# Altium PCB PCB3.PcbDoc (part 2 of 4)
Units mm, origin at the board's own origin, x right, y up, seen from the top; angles counter-clockwise.
Board outline 130 x 71 mm, 4 copper layers (Top Layer, Mid Layer 1, Mid Layer 2, Bottom Layer), stack 1.57 mm thick; 325 components, 359 nets, 1545 pads, 1046 vias.
Unrouted connection lines stored in the file: 158.
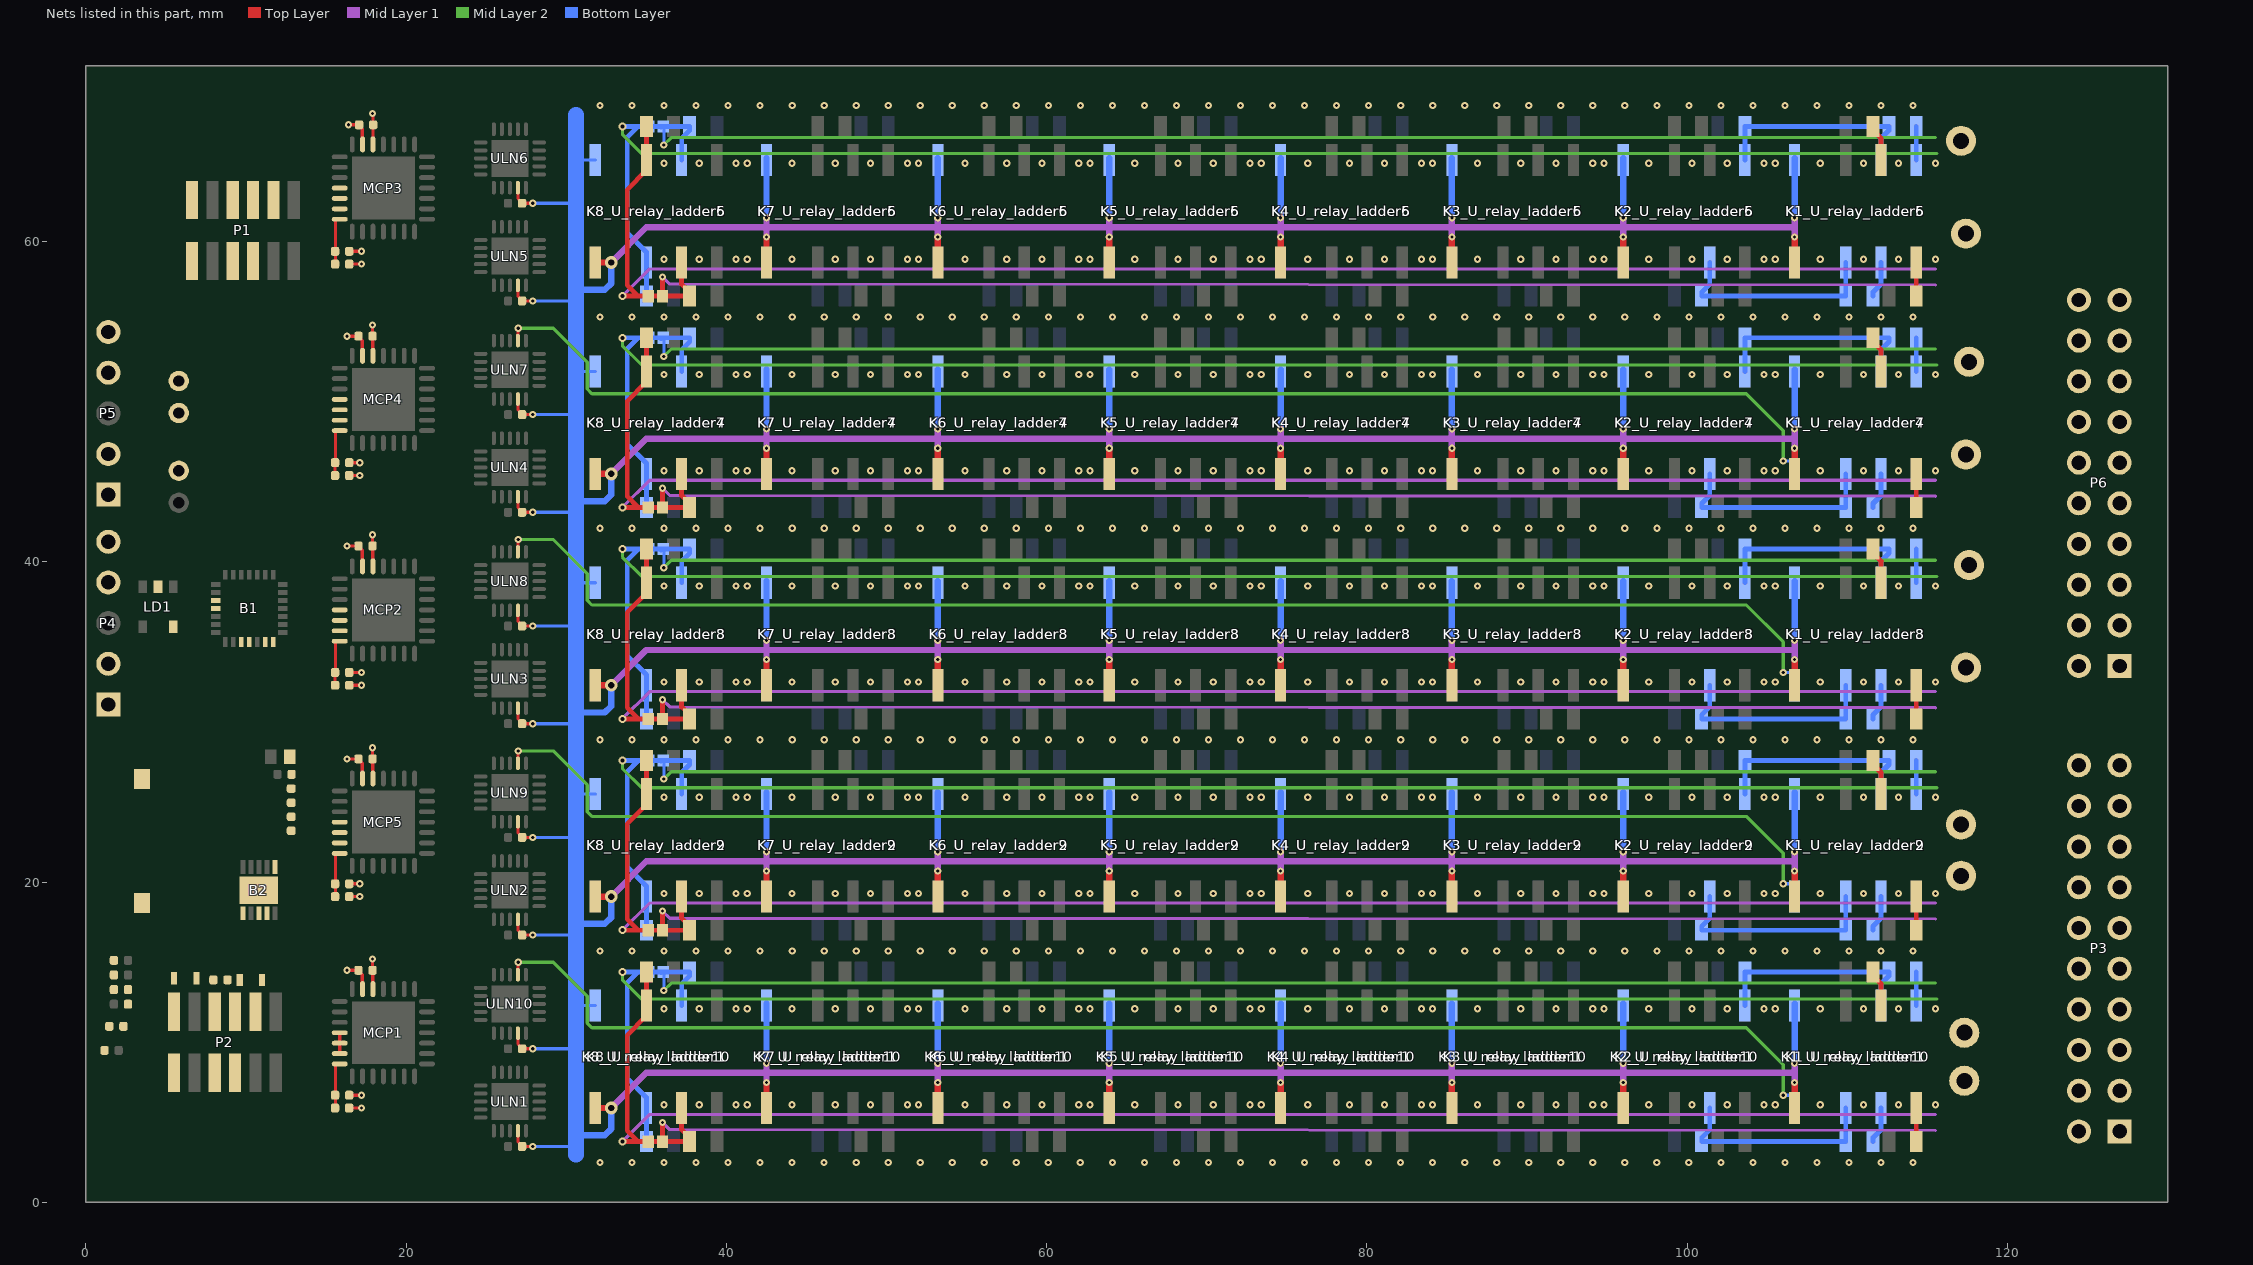
[diagram p4: the nets of this part, all layers, seen from the top]

## Part data
B1: "Mainstream Arm Cortex-M0+ MCU with 32 Kbytes of Flash memory, 12 Kbytes RAM, 48 MHz CPU, 2x USART, timers, ADC, comm. I/F, 2-3.6V", Manufacturer_Name=STMicroelectronics, Mouser Part Number=511-STM32C031G6U6, Datasheet Link=https://www.st.com/resource/en/datasheet/stm32c031c4.pdf, Geometry.Height=0.6mm, Manufacturer_Part_Number=STM32C031G6U6, Mouser Price/Stock=https://www.mouser.co.uk/ProductDetail/STMicroelectronics/STM32C031G6U6?qs=IPgv5n7u5QZqRf3nOTChhw%3D%3D
B2: "RS-422/RS-485 Interface IC Wide Supply Trans with I/O Interface", Manufacturer_Name="MaxLinear, Inc.", Mouser Part Number=701-XR33202EEHBTR-F, Datasheet Link=https://www.maxlinear.com/ds/xr33202.pdf, Geometry.Height=0.8mm, Manufacturer_Part_Number=XR33202EEHBTR-F, Mouser Price/Stock=https://www.mouser.co.uk/ProductDetail/MaxLinear/XR33202EEHBTR-F?qs=GtWAI9k6EVi4nRW8bj1LFw%3D%3D
C1 C2 C3 C4 C5 C6 C7 C8 C9 C10 C11 C12 C13 C14 C15 C16 C17 C18 C19 C22 C23 C24 C25 C26 C27 C28 C29: library part C, "Capacitor"
C20 C21: "Capacitor Polarized"
K1_U_relay_ladder1 K1_U_relay_ladder2 K1_U_relay_ladder3 K1_U_relay_ladder4 K1_U_relay_ladder5 K1_U_relay_ladder6 K1_U_relay_ladder7 K1_U_relay_ladder8 K1_U_relay_ladder9 K1_U_relay_ladder10 K2_U_relay_ladder1 K2_U_relay_ladder2 K2_U_relay_ladder3 K2_U_relay_ladder4 K2_U_relay_ladder5 K2_U_relay_ladder6 K2_U_relay_ladder7 K2_U_relay_ladder8 K2_U_relay_ladder9 K2_U_relay_ladder10 K3_U_relay_ladder1 K3_U_relay_ladder2 K3_U_relay_ladder3 K3_U_relay_ladder4 K3_U_relay_ladder5 K3_U_relay_ladder6 K3_U_relay_ladder7 K3_U_relay_ladder8 K3_U_relay_ladder9 K3_U_relay_ladder10 K4_U_relay_ladder1 K4_U_relay_ladder2 K4_U_relay_ladder3 K4_U_relay_ladder4 K4_U_relay_ladder5 K4_U_relay_ladder6 K4_U_relay_ladder7 K4_U_relay_ladder8 K4_U_relay_ladder9 K4_U_relay_ladder10 K5_U_relay_ladder1 K5_U_relay_ladder2 K5_U_relay_ladder3 K5_U_relay_ladder4 K5_U_relay_ladder5 K5_U_relay_ladder6 K5_U_relay_ladder7 K5_U_relay_ladder8 K5_U_relay_ladder9 K5_U_relay_ladder10 K6_U_relay_ladder1 K6_U_relay_ladder2 K6_U_relay_ladder3 K6_U_relay_ladder4 K6_U_relay_ladder5 K6_U_relay_ladder6 K6_U_relay_ladder7 K6_U_relay_ladder8 K6_U_relay_ladder9 K6_U_relay_ladder10 K7_U_relay_ladder1 K7_U_relay_ladder2 K7_U_relay_ladder3 K7_U_relay_ladder4 K7_U_relay_ladder5 K7_U_relay_ladder6 K7_U_relay_ladder7 K7_U_relay_ladder8 K7_U_relay_ladder9 K7_U_relay_ladder10 K8_U_relay_ladder1 K8_U_relay_ladder2 K8_U_relay_ladder3 K8_U_relay_ladder4 K8_U_relay_ladder5 K8_U_relay_ladder6 K8_U_relay_ladder7 K8_U_relay_ladder8 K8_U_relay_ladder9 K8_U_relay_ladder10: library part "IM-GR Relay DPDT", "TE CONNECTIVITY  IM-GR  RELAY, DPDT, NO", Farnell ID=1175070, URL=http://si.farnell.com/te-connectivity-axicom/im06gr/relay-gull-wing-dpco-12vdc-2a/dp/1175070
P1 P2: library part "Header 6X2", "Header, 6-Pin, Dual row", LatestRevisionDate=17-Jul-2002, LatestRevisionNote="Re-released for DXP Platform.", Publisher="Altium Limited"
P3 P6: "Header, 10-Pin, Dual row", LatestRevisionDate=17-Jul-2002, LatestRevisionNote="Re-released for DXP Platform.", Publisher="Altium Limited"
P4 P5: "Header, 5-Pin", LatestRevisionDate=17-Jul-2002, LatestRevisionNote="Re-released for DXP Platform.", Publisher="Altium Limited"
R1 R2 R3 R4 R5_U_relay_ladder1 R5_U_relay_ladder2 R5_U_relay_ladder3 R5_U_relay_ladder4 R5_U_relay_ladder5 R5_U_relay_ladder6 R5_U_relay_ladder7 R5_U_relay_ladder8 R5_U_relay_ladder9 R5_U_relay_ladder10 R6_U_relay_ladder1 R6_U_relay_ladder2 R6_U_relay_ladder3 R6_U_relay_ladder4 R6_U_relay_ladder5 R6_U_relay_ladder6 R6_U_relay_ladder7 R6_U_relay_ladder8 R6_U_relay_ladder9 R6_U_relay_ladder10 R7_U_relay_ladder1 R7_U_relay_ladder2 R7_U_relay_ladder3 R7_U_relay_ladder4 R7_U_relay_ladder5 R7_U_relay_ladder6 R7_U_relay_ladder7 R7_U_relay_ladder8 R7_U_relay_ladder9 R7_U_relay_ladder10 R8_U_relay_ladder1 R8_U_relay_ladder2 R8_U_relay_ladder3 R8_U_relay_ladder4 R8_U_relay_ladder5 R8_U_relay_ladder6 R8_U_relay_ladder7 R8_U_relay_ladder8 R8_U_relay_ladder9 R8_U_relay_ladder10 R9_U_relay_ladder1 R9_U_relay_ladder2 R9_U_relay_ladder3 R9_U_relay_ladder4 R9_U_relay_ladder5 R9_U_relay_ladder6 R9_U_relay_ladder7 R9_U_relay_ladder8 R9_U_relay_ladder9 R9_U_relay_ladder10 R10_U_relay_ladder1 R10_U_relay_ladder2 R10_U_relay_ladder3 R10_U_relay_ladder4 R10_U_relay_ladder5 R10_U_relay_ladder6 R10_U_relay_ladder7 R10_U_relay_ladder8 R10_U_relay_ladder9 R10_U_relay_ladder10 R11_U_relay_ladder1 R11_U_relay_ladder2 R11_U_relay_ladder3 R11_U_relay_ladder4 R11_U_relay_ladder5 R11_U_relay_ladder6 R11_U_relay_ladder7 R11_U_relay_ladder8 R11_U_relay_ladder9 R11_U_relay_ladder10 R12_U_relay_ladder1 R12_U_relay_ladder2 R12_U_relay_ladder3 R12_U_relay_ladder4 R12_U_relay_ladder5 R12_U_relay_ladder6 R12_U_relay_ladder7 R12_U_relay_ladder8 R12_U_relay_ladder9 R12_U_relay_ladder10 R13_U_relay_ladder1 R13_U_relay_ladder2 R13_U_relay_ladder3 R13_U_relay_ladder4 R13_U_relay_ladder5 R13_U_relay_ladder6 R13_U_relay_ladder7 R13_U_relay_ladder8 R13_U_relay_ladder9 R13_U_relay_ladder10 R14_U_relay_ladder1 R14_U_relay_ladder2 R14_U_relay_ladder3 R14_U_relay_ladder4 R14_U_relay_ladder5 R14_U_relay_ladder6 R14_U_relay_ladder7 R14_U_relay_ladder8 R14_U_relay_ladder9 R14_U_relay_ladder10 R15_U_relay_ladder1 R15_U_relay_ladder2 R15_U_relay_ladder3 R15_U_relay_ladder4 R15_U_relay_ladder5 R15_U_relay_ladder6 R15_U_relay_ladder7 R15_U_relay_ladder8 R15_U_relay_ladder9 R15_U_relay_ladder10 R16_U_relay_ladder1 R16_U_relay_ladder2 R16_U_relay_ladder3 R16_U_relay_ladder4 R16_U_relay_ladder5 R16_U_relay_ladder6 R16_U_relay_ladder7 R16_U_relay_ladder8 R16_U_relay_ladder9 R16_U_relay_ladder10 R17_U_relay_ladder1 R17_U_relay_ladder2 R17_U_relay_ladder3 R17_U_relay_ladder4 R17_U_relay_ladder5 R17_U_relay_ladder6 R17_U_relay_ladder7 R17_U_relay_ladder8 R17_U_relay_ladder9 R17_U_relay_ladder10 R18_U_relay_ladder1 R18_U_relay_ladder2 R18_U_relay_ladder3 R18_U_relay_ladder4 R18_U_relay_ladder5 R18_U_relay_ladder6 R18_U_relay_ladder7 R18_U_relay_ladder8 R18_U_relay_ladder9 R18_U_relay_ladder10 R19_U_relay_ladder1 R19_U_relay_ladder2 R19_U_relay_ladder3 R19_U_relay_ladder4 R19_U_relay_ladder5 R19_U_relay_ladder6 R19_U_relay_ladder7 R19_U_relay_ladder8 R19_U_relay_ladder9 R19_U_relay_ladder10 R20_U_relay_ladder1 R20_U_relay_ladder2 R20_U_relay_ladder3 R20_U_relay_ladder4 R20_U_relay_ladder5 R20_U_relay_ladder6 R20_U_relay_ladder7 R20_U_relay_ladder8 R20_U_relay_ladder9 R20_U_relay_ladder10 R21 R22 R23 R24 R25: library part R, "R"
X1: "Tactile Switches Tact 50mA 12VDC, 6.0x3.5, 2.5mm H, 180gf, G leads, No ground pin, White Actuator", Manufacturer_Name="C & K COMPONENTS", Manufacturer_Part_Number="PTS636 SM25 SMTR LFS", Mouser Part Number=611-PTS636SM25SMTRLF, Datasheet Link="https://componentsearchengine.com/Datasheets/1/PTS636 SM25 SMTR LFS.pdf", Geometry.Height=2.7mm, Mouser Price/Stock=https://www.mouser.co.uk/ProductDetail/CK/PTS636-SM25-SMTR-LFS?qs=vLWxofP3U2yIXR4iooxesw%3D%3D

## Via types
v1: diameter 0.45, hole 0.2, Top Layer to Bottom Layer, 944 vias
v2: diameter 0.5, hole 0.2, Top Layer to Bottom Layer, 85 vias
v3: diameter 0.5, hole 0.25, Top Layer to Bottom Layer, 10 vias
v4: diameter 0.8, hole 0.4, Top Layer to Bottom Layer, 5 vias
v5: diameter 5.5, hole 3, Top Layer to Bottom Layer, 2 vias

## Nets (pads, with @x,y where several pads share a name; then routed paths per layer and width w, separated by ;. In a path a pad name is that pad's centre, name@x,y a point inside that pad or via, vN(x,y) a via of type N, cw(c..) or ccw(c..) an arc to the next point about the centre after c; other vN are vias at no path point)
+3V3: B1.3 B2.1 C1.1 C3.1 C7.2 C10.1 C11.1 C12.2 C13.2 C24.2 C25.2 LD1.5 MCP1.5 MCP2.5 MCP2.11 MCP3.5 MCP3.12 MCP4.5 MCP4.11 MCP4.12 MCP5.5 MCP5.13 R1.1 R2.1 R4.1 R21.1 R22.1 R23.1 R24.1 R25.1 | length 13.3
  Top Layer w0.2: R21.1@16.44,5.9 v1(17.2,5.9) ; R25.1@16.44,19.1 v1(17.1,19.1) ; R22.1@16.44,32.3 v1(17.2,32.3) ; R24.1@16.44,45.4 v1(17.1,45.4) ; R23.1@16.44,58.6 v1(17.2,58.6) ; v1(17.9,15.2) C13.2@17.9,14.5 17.912,14.488 17.912,13.338 MCP1.5@17.925,13.325 ; v1(17.9,28.4) C12.2@17.9,27.7 17.912,27.688 17.912,26.488 MCP5.5@17.925,26.475 ; v1(17.9,41.7) C25.2@17.9,41 17.912,40.988 17.912,39.738 MCP2.5@17.925,39.725 ; v1(17.9,54.8) C7.2@17.9,54.1 17.912,54.088 17.912,52.887 MCP4.5@17.925,52.875 ; v1(17.9,68) 17.92,67.98 17.92,67.32 C24.2@17.94,67.3 17.932,67.293 17.932,66.083 MCP3.5@17.925,66.075
+12: C14.1 C15.1 C16.1 C17.1 C18.1 C19.1 C20.1 C26.1 C27.1 C28.1 C29.1 K1_U_relay_ladder1.1 K1_U_relay_ladder2.1 K1_U_relay_ladder3.1 K1_U_relay_ladder4.1 K1_U_relay_ladder5.1 K1_U_relay_ladder6.1 K1_U_relay_ladder7.1 K1_U_relay_ladder8.1 K1_U_relay_ladder9.1 K1_U_relay_ladder10.1 K2_U_relay_ladder1.1 K2_U_relay_ladder2.1 K2_U_relay_ladder3.1 K2_U_relay_ladder4.1 K2_U_relay_ladder5.1 K2_U_relay_ladder6.1 K2_U_relay_ladder7.1 K2_U_relay_ladder8.1 K2_U_relay_ladder9.1 K2_U_relay_ladder10.1 K3_U_relay_ladder1.1 K3_U_relay_ladder2.1 K3_U_relay_ladder3.1 K3_U_relay_ladder4.1 K3_U_relay_ladder5.1 K3_U_relay_ladder6.1 K3_U_relay_ladder7.1 K3_U_relay_ladder8.1 K3_U_relay_ladder9.1 K3_U_relay_ladder10.1 K4_U_relay_ladder1.1 K4_U_relay_ladder2.1 K4_U_relay_ladder3.1 K4_U_relay_ladder4.1 K4_U_relay_ladder5.1 K4_U_relay_ladder6.1 K4_U_relay_ladder7.1 K4_U_relay_ladder8.1 K4_U_relay_ladder9.1 K4_U_relay_ladder10.1 K5_U_relay_ladder1.1 K5_U_relay_ladder2.1 K5_U_relay_ladder3.1 K5_U_relay_ladder4.1 K5_U_relay_ladder5.1 K5_U_relay_ladder6.1 K5_U_relay_ladder7.1 K5_U_relay_ladder8.1 K5_U_relay_ladder9.1 K5_U_relay_ladder10.1 K6_U_relay_ladder1.1 K6_U_relay_ladder2.1 K6_U_relay_ladder3.1 K6_U_relay_ladder4.1 K6_U_relay_ladder5.1 K6_U_relay_ladder6.1 K6_U_relay_ladder7.1 K6_U_relay_ladder8.1 K6_U_relay_ladder9.1 K6_U_relay_ladder10.1 K7_U_relay_ladder1.1 K7_U_relay_ladder2.1 K7_U_relay_ladder3.1 K7_U_relay_ladder4.1 K7_U_relay_ladder5.1 K7_U_relay_ladder6.1 K7_U_relay_ladder7.1 K7_U_relay_ladder8.1 K7_U_relay_ladder9.1 K7_U_relay_ladder10.1 K8_U_relay_ladder1.1 K8_U_relay_ladder2.1 K8_U_relay_ladder3.1 K8_U_relay_ladder4.1 K8_U_relay_ladder5.1 K8_U_relay_ladder6.1 K8_U_relay_ladder7.1 K8_U_relay_ladder8.1 K8_U_relay_ladder9.1 K8_U_relay_ladder10.1 P4.2 P4.4 P5.2 P5.4 ULN1.9 ULN2.9 ULN3.9 ULN4.9 ULN5.9 ULN6.9 ULN7.9 ULN8.9 ULN9.9 ULN10.9 | length 740
  Top Layer w0.2: ULN1.9@26.975,4.475 26.985,4.465 26.985,3.792 27.24,3.536 C15.1@27.24,3.5 v1(27.9,3.5) ; ULN10.9@26.975,10.575 26.985,10.565 26.985,9.892 27.24,9.636 C16.1@27.24,9.6 v1(27.9,9.6) ; ULN2.9@26.975,17.675 26.985,17.665 26.985,16.992 27.24,16.736 C17.1@27.24,16.7 v1(27.9,16.7) ; ULN9.9@26.975,23.775 26.985,23.765 26.985,23.092 27.24,22.836 C26.1@27.24,22.8 v1(27.9,22.8) ; ULN3.9@26.975,30.875 26.985,30.865 26.985,30.192 27.24,29.936 C28.1@27.24,29.9 v1(27.9,29.9) ; ULN8.9@26.975,36.975 26.985,36.965 26.985,36.292 27.24,36.036 C29.1@27.24,36 v1(27.9,36) ; ULN4.9@26.975,44.075 26.985,44.065 26.985,43.392 27.24,43.136 C27.1@27.24,43.1 v1(27.9,43.1) ; ULN7.9@26.975,50.175 26.985,50.165 26.985,49.492 27.24,49.236 C14.1@27.24,49.2 v1(27.9,49.2) ; ULN5.9@26.975,57.275 26.985,57.265 26.985,56.592 27.24,56.336 C19.1@27.24,56.3 v1(27.9,56.3) ; ULN6.9@26.975,63.375 26.985,63.365 26.985,62.692 27.24,62.436 C18.1@27.24,62.4 v1(27.9,62.4)
  Top Layer w0.4: K8_U_relay_ladder10.1@31.803,5.9 v4(32.8,5.9) ; K8_U_relay_ladder9.1@31.803,19.1 v4(32.8,19.1) ; K8_U_relay_ladder8.1@31.803,32.3 v4(32.8,32.3) ; K8_U_relay_ladder7.1@31.803,45.5 v4@32.8,45.5 ; K8_U_relay_ladder6.1@31.803,58.7 v4(32.8,58.7) ; v1(42.5,7.5) 42.5,5.9 K7_U_relay_ladder10.1@42.503,5.9 ; v1(42.5,20.7) 42.5,19.1 K7_U_relay_ladder9.1@42.503,19.1 ; v1(42.5,33.9) 42.5,32.3 K7_U_relay_ladder8.1@42.503,32.3 ; v1(42.5,47.1) 42.5,45.5 K7_U_relay_ladder7.1@42.503,45.5 ; v1(42.5,60.3) 42.5,58.7 K7_U_relay_ladder6.1@42.503,58.7 ; K6_U_relay_ladder10.1@53.2,5.9 v1(53.2,7.5) ; K6_U_relay_ladder9.1@53.2,19.1 v1(53.2,20.7) ; K6_U_relay_ladder8.1@53.2,32.3 v1(53.2,33.9) ; K6_U_relay_ladder7.1@53.2,45.5 v1(53.2,47.1) ; K6_U_relay_ladder6.1@53.2,58.7 v1(53.2,60.3) ; K5_U_relay_ladder10.1@63.903,5.9 v1(63.903,7.5) ; K5_U_relay_ladder9.1@63.903,19.1 v1(63.903,20.7) ; K5_U_relay_ladder8.1@63.903,32.3 v1(63.903,33.9) ; K5_U_relay_ladder7.1@63.903,45.5 v1(63.903,47.1) ; K5_U_relay_ladder6.1@63.903,58.7 v1(63.903,60.3) ; K4_U_relay_ladder10.1@74.603,5.9 v1(74.603,7.5) ; K4_U_relay_ladder9.1@74.603,19.1 v1(74.603,20.7) ; K4_U_relay_ladder8.1@74.603,32.3 v1(74.603,33.9) ; K4_U_relay_ladder7.1@74.603,45.5 v1(74.603,47.1) ; K4_U_relay_ladder6.1@74.603,58.7 v1(74.603,60.3) ; K3_U_relay_ladder10.1@85.303,5.9 v1(85.303,7.5) ; K3_U_relay_ladder9.1@85.303,19.1 v1(85.303,20.7) ; K3_U_relay_ladder8.1@85.303,32.3 v1(85.303,33.9) ; K3_U_relay_ladder7.1@85.303,45.5 v1(85.303,47.1) ; K3_U_relay_ladder6.1@85.303,58.7 v1(85.303,60.3) ; K2_U_relay_ladder10.1@96.003,5.9 v1(96.003,7.5) ; K2_U_relay_ladder9.1@96.003,19.1 v1(96.003,20.7) ; K2_U_relay_ladder8.1@96.003,32.3 v1(96.003,33.9) ; K2_U_relay_ladder7.1@96.003,45.5 v1(96.003,47.1) ; K2_U_relay_ladder6.1@96.003,58.7 v1(96.003,60.3) ; K1_U_relay_ladder10.1@106.703,5.9 v1(106.703,7.5) ; K1_U_relay_ladder9.1@106.703,19.1 v1(106.703,20.7) ; K1_U_relay_ladder8.1@106.703,32.3 v1(106.703,33.9) ; K1_U_relay_ladder7.1@106.703,45.5 v1(106.703,47.1) ; K1_U_relay_ladder6.1@106.703,58.7 v1(106.703,60.3)
  Mid Layer 1 w0.4: v4(32.8,5.9) 35,8.1 42.5,8.1 ; v4(32.8,19.1) 35,21.3 42.5,21.3 ; v4(32.8,32.3) 35,34.5 42.5,34.5 ; v4(32.8,45.5) 35,47.7 42.5,47.7 ; v4(32.8,58.7) 35,60.9 42.5,60.9 ; v1(42.5,7.5) 42.5,8.1 ; v1(42.5,8.7) 42.5,8.1 ; v1(42.5,20.7) 42.5,21.3 ; v1(42.5,21.9) 42.5,21.3 ; v1(42.5,33.9) 42.5,34.5 ; v1(42.5,35.1) 42.5,34.5 ; v1(42.5,47.1) 42.5,47.7 ; v1(42.5,48.3) 42.5,47.7 ; v1(42.5,60.3) 42.5,60.9 ; v1(42.5,61.5) 42.5,60.9 ; v1(53.2,7.5) 53.2,8.1 ; v1(53.2,8.7) 53.2,8.1 ; v1(53.2,20.7) 53.2,21.3 ; v1(53.2,21.9) 53.2,21.3 ; v1(53.2,33.9) 53.2,34.5 ; v1(53.2,35.1) 53.2,34.5 ; v1(53.2,47.1) 53.2,47.7 ; v1(53.2,48.3) 53.2,47.7 ; v1(53.2,60.3) 53.2,60.9 ; v1(53.2,61.5) 53.2,60.9 ; 53.203,8.1 63.903,8.1 ; 53.203,21.3 63.903,21.3 ; 53.203,34.5 63.903,34.5 ; 53.203,47.7 63.903,47.7 ; 53.203,60.9 63.903,60.9 ; v1(63.903,7.5) 63.903,8.1 ; v1(63.903,8.7) 63.903,8.1 ; v1(63.903,20.7) 63.903,21.3 ; v1(63.903,21.9) 63.903,21.3 ; v1(63.903,33.9) 63.903,34.5 ; v1(63.903,35.1) 63.903,34.5 ; v1(63.903,47.1) 63.903,47.7 ; v1(63.903,48.3) 63.903,47.7 ; v1(63.903,60.3) 63.903,60.9 ; v1(63.903,61.5) 63.903,60.9 ; v1(74.603,7.5) 74.603,8.1 ; v1(74.603,8.7) 74.603,8.1 ; v1(74.603,20.7) 74.603,21.3 ; v1(74.603,21.9) 74.603,21.3 ; v1(74.603,33.9) 74.603,34.5 ; v1(74.603,35.1) 74.603,34.5 ; v1(74.603,47.1) 74.603,47.7 ; v1(74.603,48.3) 74.603,47.7 ; v1(74.603,60.3) 74.603,60.9 ; v1(74.603,61.5) 74.603,60.9 ; v1(85.303,7.5) 85.303,8.1 ; v1(85.303,8.7) 85.303,8.1 ; v1(85.303,20.7) 85.303,21.3 ; v1(85.303,21.9) 85.303,21.3 ; v1(85.303,33.9) 85.303,34.5 ; v1(85.303,35.1) 85.303,34.5 ; v1(85.303,47.1) 85.303,47.7 ; v1(85.303,48.3) 85.303,47.7 ; v1(85.303,60.3) 85.303,60.9 ; v1(85.303,61.5) 85.303,60.9 ; v1(96.003,7.5) 96.003,8.1 ; v1(96.003,8.7) 96.003,8.1 ; v1(96.003,20.7) 96.003,21.3 ; v1(96.003,21.9) 96.003,21.3 ; v1(96.003,33.9) 96.003,34.5 ; v1(96.003,35.1) 96.003,34.5 ; v1(96.003,47.1) 96.003,47.7 ; v1(96.003,48.3) 96.003,47.7 ; v1(96.003,60.3) 96.003,60.9 ; v1(96.003,61.5) 96.003,60.9 ; v1(106.703,7.5) 106.703,8.1 ; v1(106.703,8.7) 106.703,8.1 ; v1(106.703,20.7) 106.703,21.3 ; v1(106.703,21.9) 106.703,21.3 ; v1(106.703,33.9) 106.703,34.5 ; v1(106.703,35.1) 106.703,34.5 ; v1(106.703,47.1) 106.703,47.7 ; v1(106.703,48.3) 106.703,47.7 ; v1(106.703,60.3) 106.703,60.9 ; v1(106.703,61.5) 106.703,60.9 ; 42.5,8.1 53.2,8.1 ; 42.5,21.3 53.2,21.3 ; 42.5,34.5 53.2,34.5 ; 42.5,47.7 53.2,47.7 ; 42.5,60.9 53.2,60.9 ; 63.903,8.1 74.603,8.1 ; 63.903,21.3 74.603,21.3 ; 63.903,34.5 74.603,34.5 ; 63.903,47.7 74.603,47.7 ; 63.903,60.9 74.603,60.9 ; 74.603,8.1 85.303,8.1 ; 74.603,21.3 85.303,21.3 ; 74.603,34.5 85.303,34.5 ; 74.603,47.7 85.303,47.7 ; 74.603,60.9 85.303,60.9 ; 85.303,8.1 96.003,8.1 ; 85.303,21.3 96.003,21.3 ; 85.303,34.5 96.003,34.5 ; 85.303,47.7 96.003,47.7 ; 85.303,60.9 96.003,60.9 ; 96.003,8.1 106.703,8.1 ; 96.003,21.3 106.703,21.3 ; 96.003,34.5 106.703,34.5 ; 96.003,47.7 106.703,47.7 ; 96.003,60.9 106.703,60.9
  Bottom Layer w0.2: v1(27.9,3.5) 30.4,3.5 30.6,3.7 ; v1(27.9,9.6) 30.6,9.6 ; v1(27.9,16.7) 30.6,16.7 ; v1(27.9,22.8) 30.6,22.8 ; v1(27.9,29.9) 30.6,29.9 ; v1(27.9,36) 30.6,36 ; v1(27.9,43.1) 30.6,43.1 ; v1(27.9,49.2) 30.6,49.2 ; v1(27.9,56.3) 30.6,56.3 ; v1(27.9,62.4) 30.6,62.4 ; 30.6,12.3 K8_U_relay_ladder1.1@31.802,12.3 ; 30.6,25.5 K8_U_relay_ladder2.1@31.802,25.5 ; 30.6,38.7 K8_U_relay_ladder3.1@31.802,38.7 ; 30.6,51.9 K8_U_relay_ladder4.1@31.802,51.9 ; 30.6,65.1 K8_U_relay_ladder5.1@31.802,65.1
  Bottom Layer w0.4: 30.6,4.3 30.7,4.2 32.409,4.2 32.8,4.591 v4(32.8,5.9) ; 30.7,17.4 32.409,17.4 32.8,17.791 v4(32.8,19.1) ; 30.7,30.6 32.409,30.6 32.8,30.991 v4(32.8,32.3) ; 30.7,43.8 32.409,43.8 32.8,44.191 v4(32.8,45.5) ; 30.7,57 32.409,57 32.8,57.391 v4(32.8,58.7) ; v1(42.5,8.7) K7_U_relay_ladder1.1@42.5,12.4 ; v1(42.5,21.9) K7_U_relay_ladder2.1@42.5,25.6 ; v1(42.5,35.1) K7_U_relay_ladder3.1@42.5,38.8 ; v1(42.5,48.3) K7_U_relay_ladder4.1@42.5,52 ; v1(42.5,61.5) K7_U_relay_ladder5.1@42.5,65.2 ; v1(53.2,8.7) K6_U_relay_ladder1.1@53.2,12.4 ; v1(53.2,21.9) K6_U_relay_ladder2.1@53.2,25.6 ; v1(53.2,35.1) K6_U_relay_ladder3.1@53.2,38.8 ; v1(53.2,48.3) K6_U_relay_ladder4.1@53.2,52 ; v1(53.2,61.5) K6_U_relay_ladder5.1@53.2,65.2 ; v1(63.903,8.7) K5_U_relay_ladder1.1@63.903,12.4 ; v1(63.903,21.9) K5_U_relay_ladder2.1@63.903,25.6 ; v1(63.903,35.1) K5_U_relay_ladder3.1@63.903,38.8 ; v1(63.903,48.3) K5_U_relay_ladder4.1@63.903,52 ; v1(63.903,61.5) K5_U_relay_ladder5.1@63.903,65.2 ; v1(74.603,8.7) K4_U_relay_ladder1.1@74.603,12.4 ; v1(74.603,21.9) K4_U_relay_ladder2.1@74.603,25.6 ; v1(74.603,35.1) K4_U_relay_ladder3.1@74.603,38.8 ; v1(74.603,48.3) K4_U_relay_ladder4.1@74.603,52 ; v1(74.603,61.5) K4_U_relay_ladder5.1@74.603,65.2 ; v1(85.303,8.7) K3_U_relay_ladder1.1@85.303,12.4 ; v1(85.303,21.9) K3_U_relay_ladder2.1@85.303,25.6 ; v1(85.303,35.1) K3_U_relay_ladder3.1@85.303,38.8 ; v1(85.303,48.3) K3_U_relay_ladder4.1@85.303,52 ; v1(85.303,61.5) K3_U_relay_ladder5.1@85.303,65.2 ; v1(96.003,8.7) K2_U_relay_ladder1.1@96.003,12.4 ; v1(96.003,21.9) K2_U_relay_ladder2.1@96.003,25.6 ; v1(96.003,35.1) K2_U_relay_ladder3.1@96.003,38.8 ; v1(96.003,48.3) K2_U_relay_ladder4.1@96.003,52 ; v1(96.003,61.5) K2_U_relay_ladder5.1@96.003,65.2 ; v1(106.703,8.7) K1_U_relay_ladder1.1@106.703,12.4 ; v1(106.703,21.9) K1_U_relay_ladder2.1@106.703,25.6 ; v1(106.703,35.1) K1_U_relay_ladder3.1@106.703,38.8 ; v1(106.703,48.3) K1_U_relay_ladder4.1@106.703,52 ; v1(106.703,61.5) K1_U_relay_ladder5.1@106.703,65.2
  Bottom Layer w1: 30.6,3 30.6,3.7 30.6,4.3 30.6,9.6 30.6,12.3 30.6,16.7 30.6,22.8 30.6,25.5 30.6,29.9 30.6,36 30.6,38.7 30.6,43.1 30.6,49.2 30.6,51.9 30.6,56.3 30.6,62.4 30.6,65.1 30.6,67.9
A1: K1_U_relay_ladder10.6 P3.3 R13_U_relay_ladder10.1 | length 2.3
  Top Layer w0.3: R13_U_relay_ladder10.1@111.6,14.4 111.6,14.15 112.1,13.65 K1_U_relay_ladder10.6@112.1,12.3
A2: K1_U_relay_ladder9.6 P3.7 R13_U_relay_ladder9.1 | length 2.3
  Top Layer w0.3: R13_U_relay_ladder9.1@111.6,27.6 111.6,27.35 112.1,26.85 K1_U_relay_ladder9.6@112.1,25.5
A3: K1_U_relay_ladder8.6 P3.11 R13_U_relay_ladder8.1 | length 2.3
  Top Layer w0.3: R13_U_relay_ladder8.1@111.6,40.8 111.6,40.55 112.1,40.05 K1_U_relay_ladder8.6@112.1,38.7
A4: K1_U_relay_ladder7.6 P3.15 R13_U_relay_ladder7.1 | length 2.3
  Top Layer w0.3: R13_U_relay_ladder7.1@111.6,54 111.6,53.75 112.1,53.25 K1_U_relay_ladder7.6@112.1,51.901
A5: K1_U_relay_ladder6.6 P3.19 R13_U_relay_ladder6.1 | length 2.3
  Top Layer w0.3: R13_U_relay_ladder6.1@111.6,67.2 111.6,66.95 112.1,66.45 K1_U_relay_ladder6.6@112.1,65.1
A6: K1_U_relay_ladder5.6 P6.17 R13_U_relay_ladder5.1 | length 2.3
  Bottom Layer w0.3: R13_U_relay_ladder5.1@111.6,56.6 111.6,56.85 112.1,57.35 K1_U_relay_ladder5.6@112.1,58.7
A7: K1_U_relay_ladder4.6 P6.13 R13_U_relay_ladder4.1 | length 2.3
  Bottom Layer w0.3: R13_U_relay_ladder4.1@111.6,43.4 111.6,43.65 112.1,44.15 K1_U_relay_ladder4.6@112.1,45.5
A8: K1_U_relay_ladder3.6 P6.9 R13_U_relay_ladder3.1 | length 2.3
  Bottom Layer w0.3: R13_U_relay_ladder3.1@111.6,30.2 111.6,30.45 112.1,30.95 K1_U_relay_ladder3.6@112.1,32.299
A9: K1_U_relay_ladder2.6 P6.5 R13_U_relay_ladder2.1 | length 2.3
  Bottom Layer w0.3: R13_U_relay_ladder2.1@111.6,17 111.6,17.25 112.1,17.75 K1_U_relay_ladder2.6@112.1,19.1
A10: K1_U_relay_ladder1.6 P6.1 R13_U_relay_ladder1.1 | length 2.3
  Bottom Layer w0.3: R13_U_relay_ladder1.1@111.6,3.8 111.6,4.05 112.1,4.55 K1_U_relay_ladder1.6@112.1,5.9
A_N: B2.8 P1.6 P2.6 R3.2
AGND: P3.4 P3.8 P3.12 P3.16 P3.20 P6.4 P6.8 P6.12 P6.16 P6.20
  other v1: 32.1,2.5 34.1,2.5 36.1,2.5 38.1,2.5 40.1,2.5 42.1,2.5 44.1,2.5 46.1,2.5 48.1,2.5 50.1,2.5 52.1,2.5 54.1,2.5 56.1,2.5 58.1,2.5 60.1,2.5 62.1,2.5 64.1,2.5 66.1,2.5 68.1,2.5 70.1,2.5 72.1,2.5 74.1,2.5 76.1,2.5 78.1,2.5 80.1,2.5 82.1,2.5 84.1,2.5 86.1,2.5 88.1,2.5 90.1,2.5 92.1,2.5 94.1,2.5 96.1,2.5 98.1,2.5 100.1,2.5 102.1,2.5 104.1,2.5 106.1,2.5 108.1,2.5 110.1,2.5 112.1,2.5 114.1,2.5 36.1,6.1 38.3,6.1 40.6,6.1 41.3,6.1 44.1,6.1 46.8,6.1 49,6.1 51.3,6.1 52,6.1 54.9,6.1 57.5,6.1 59.7,6.1 62,6.1 62.7,6.1 65.5,6.1 68.2,6.1 70.4,6.1 72.7,6.1 73.4,6.1 76.3,6.1 78.9,6.1 81.1,6.1 83.4,6.1 84.1,6.1 86.9,6.1 89.6,6.1 91.8,6.1 94.1,6.1 94.8,6.1 97.6,6.1 100.3,6.1 102.5,6.1 104.8,6.1 105.5,6.1 108.3,6.1 111,6.1 113.2,6.1 115.5,6.1 36.1,12.1 38.3,12.1 40.6,12.1 41.3,12.1 44.1,12.1 46.8,12.1 49,12.1 51.3,12.1 52,12.1 54.9,12.1 57.5,12.1 59.7,12.1 62,12.1 62.7,12.1 65.5,12.1 68.2,12.1 70.4,12.1 72.7,12.1 73.4,12.1 76.3,12.1 78.9,12.1 81.1,12.1 83.4,12.1 84.1,12.1 86.9,12.1 89.6,12.1 91.8,12.1 94.1,12.1 94.8,12.1 97.6,12.1 100.3,12.1 102.5,12.1 104.8,12.1 105.5,12.1 108.3,12.1 111,12.1 113.2,12.1 115.5,12.1 32.103,15.7 34.103,15.7 36.103,15.7 38.103,15.7 40.103,15.7 42.103,15.7 44.103,15.7 46.103,15.7 48.103,15.7 50.103,15.7 52.103,15.7 54.103,15.7 56.103,15.7 58.103,15.7 60.103,15.7 62.103,15.7 64.103,15.7 66.103,15.7 68.103,15.7 70.103,15.7 72.103,15.7 74.103,15.7 76.103,15.7 78.103,15.7 80.103,15.7 82.103,15.7 84.103,15.7 86.103,15.7 88.103,15.7 90.103,15.7 92.103,15.7 94.103,15.7 96.103,15.7 98.103,15.7 100.103,15.7 102.103,15.7 104.103,15.7 106.103,15.7 108.103,15.7 110.103,15.7 112.103,15.7 114.103,15.7 36.1,19.3 38.3,19.3 40.6,19.3 41.3,19.3 44.1,19.3 46.8,19.3 49,19.3 51.3,19.3 52,19.3 54.9,19.3 57.5,19.3 59.7,19.3 62,19.3 62.7,19.3 65.5,19.3 68.2,19.3 70.4,19.3 72.7,19.3 73.4,19.3 76.3,19.3 78.9,19.3 81.1,19.3 83.4,19.3 84.1,19.3 86.9,19.3 89.6,19.3 91.8,19.3 94.1,19.3 94.8,19.3 97.6,19.3 100.3,19.3 102.5,19.3 104.8,19.3 105.5,19.3 108.3,19.3 111,19.3 113.2,19.3 115.5,19.3 36.1,25.3 38.3,25.3 40.6,25.3 41.3,25.3 44.1,25.3 46.8,25.3 49,25.3 51.3,25.3 52,25.3 54.9,25.3 57.5,25.3 59.7,25.3 62,25.3 62.7,25.3 65.5,25.3 68.2,25.3 70.4,25.3 72.7,25.3 73.4,25.3 76.3,25.3 78.9,25.3 81.1,25.3 83.4,25.3 84.1,25.3 86.9,25.3 89.6,25.3 91.8,25.3 94.1,25.3 94.8,25.3 97.6,25.3 100.3,25.3 102.5,25.3 104.8,25.3 105.5,25.3 108.3,25.3 111,25.3 113.2,25.3 115.5,25.3 32.103,28.9 34.103,28.9 36.103,28.9 38.103,28.9 40.103,28.9 42.103,28.9 44.103,28.9 46.103,28.9 48.103,28.9 50.103,28.9 52.103,28.9 54.103,28.9 56.103,28.9 58.103,28.9 60.103,28.9 62.103,28.9 64.103,28.9 66.103,28.9 68.103,28.9 70.103,28.9 72.103,28.9 74.103,28.9 76.103,28.9 78.103,28.9 80.103,28.9 82.103,28.9 84.103,28.9 86.103,28.9 88.103,28.9 90.103,28.9 92.103,28.9 94.103,28.9 96.103,28.9 98.103,28.9 100.103,28.9 102.103,28.9 104.103,28.9 106.103,28.9 108.103,28.9 110.103,28.9 112.103,28.9 114.103,28.9 36.1,32.5 38.3,32.5 40.6,32.5 41.3,32.5 44.1,32.5 46.8,32.5 49,32.5 51.3,32.5 52,32.5 54.9,32.5 57.5,32.5 59.7,32.5 62,32.5 62.7,32.5 65.5,32.5 68.2,32.5 70.4,32.5 72.7,32.5 73.4,32.5 76.3,32.5 78.9,32.5 81.1,32.5 83.4,32.5 84.1,32.5 86.9,32.5 89.6,32.5 91.8,32.5 94.1,32.5 94.8,32.5 97.6,32.5 100.3,32.5 102.5,32.5 104.8,32.5 105.5,32.5 108.3,32.5 111,32.5 113.2,32.5 115.5,32.5 36.1,38.5 38.3,38.5 40.6,38.5 41.3,38.5 44.1,38.5 46.8,38.5 49,38.5 51.3,38.5 52,38.5 54.9,38.5 57.5,38.5 59.7,38.5 62,38.5 62.7,38.5 65.5,38.5 68.2,38.5 70.4,38.5 72.7,38.5 73.4,38.5 76.3,38.5 78.9,38.5 81.1,38.5 83.4,38.5 84.1,38.5 86.9,38.5 89.6,38.5 91.8,38.5 94.1,38.5 94.8,38.5 97.6,38.5 100.3,38.5 102.5,38.5 104.8,38.5 105.5,38.5 108.3,38.5 111,38.5 113.2,38.5 115.5,38.5 32.103,42.1 34.103,42.1 36.103,42.1 38.103,42.1 40.103,42.1 42.103,42.1 44.103,42.1 46.103,42.1 48.103,42.1 50.103,42.1 52.103,42.1 54.103,42.1 56.103,42.1 58.103,42.1 60.103,42.1 62.103,42.1 64.103,42.1 66.103,42.1 68.103,42.1 70.103,42.1 72.103,42.1 74.103,42.1 76.103,42.1 78.103,42.1 80.103,42.1 82.103,42.1 84.103,42.1 86.103,42.1 88.103,42.1 90.103,42.1 92.103,42.1 94.103,42.1 96.103,42.1 98.103,42.1 100.103,42.1 102.103,42.1 104.103,42.1 106.103,42.1 108.103,42.1 110.103,42.1 112.103,42.1 114.103,42.1 36.1,45.7 38.3,45.7 40.6,45.7 41.3,45.7 44.1,45.7 46.8,45.7 49,45.7 51.3,45.7 52,45.7 54.9,45.7 57.5,45.7 59.7,45.7 62,45.7 62.7,45.7 65.5,45.7 68.2,45.7 70.4,45.7 72.7,45.7 73.4,45.7 76.3,45.7 78.9,45.7 81.1,45.7 83.4,45.7 84.1,45.7 86.9,45.7 89.6,45.7 91.8,45.7 94.1,45.7 94.8,45.7 97.6,45.7 100.3,45.7 102.5,45.7 104.8,45.7 105.5,45.7 108.3,45.7 111,45.7 113.2,45.7 115.5,45.7 36.1,51.7 38.3,51.7 40.6,51.7 41.3,51.7 44.1,51.7 46.8,51.7 49,51.7 51.3,51.7 52,51.7 54.9,51.7 57.5,51.7 59.7,51.7 62,51.7 62.7,51.7 65.5,51.7 68.2,51.7 70.4,51.7 72.7,51.7 73.4,51.7 76.3,51.7 78.9,51.7 81.1,51.7 83.4,51.7 84.1,51.7 86.9,51.7 89.6,51.7 91.8,51.7 94.1,51.7 94.8,51.7 97.6,51.7 100.3,51.7 102.5,51.7 104.8,51.7 105.5,51.7 108.3,51.7 111,51.7 113.2,51.7 115.5,51.7 32.103,55.3 34.103,55.3 36.103,55.3 38.103,55.3 40.103,55.3 42.103,55.3 44.103,55.3 46.103,55.3 48.103,55.3 50.103,55.3 52.103,55.3 54.103,55.3 56.103,55.3 58.103,55.3 60.103,55.3 62.103,55.3 64.103,55.3 66.103,55.3 68.103,55.3 70.103,55.3 72.103,55.3 74.103,55.3 76.103,55.3 78.103,55.3 80.103,55.3 82.103,55.3 84.103,55.3 86.103,55.3 88.103,55.3 90.103,55.3 92.103,55.3 94.103,55.3 96.103,55.3 98.103,55.3 100.103,55.3 102.103,55.3 104.103,55.3 106.103,55.3 108.103,55.3 110.103,55.3 112.103,55.3 114.103,55.3 36.1,58.9 38.3,58.9 40.6,58.9 41.3,58.9 44.1,58.9 46.8,58.9 49,58.9 51.3,58.9 52,58.9 54.9,58.9 57.5,58.9 59.7,58.9 62,58.9 62.7,58.9 65.5,58.9 68.2,58.9 70.4,58.9 72.7,58.9 73.4,58.9 76.3,58.9 78.9,58.9 81.1,58.9 83.4,58.9 84.1,58.9 86.9,58.9 89.6,58.9 91.8,58.9 94.1,58.9 94.8,58.9 97.6,58.9 100.3,58.9 102.5,58.9 104.8,58.9 105.5,58.9 108.3,58.9 111,58.9 113.2,58.9 115.5,58.9 36.1,64.9 38.3,64.9 40.6,64.9 41.3,64.9 44.1,64.9 46.8,64.9 49,64.9 51.3,64.9 52,64.9 54.9,64.9 57.5,64.9 59.7,64.9 62,64.9 62.7,64.9 65.5,64.9 68.2,64.9 70.4,64.9 72.7,64.9 73.4,64.9 76.3,64.9 78.9,64.9 81.1,64.9 83.4,64.9 84.1,64.9 86.9,64.9 89.6,64.9 91.8,64.9 94.1,64.9 94.8,64.9 97.6,64.9 100.3,64.9 102.5,64.9 104.8,64.9 105.5,64.9 108.3,64.9 111,64.9 113.2,64.9 115.5,64.9 32.103,68.5 34.103,68.5 36.103,68.5 38.103,68.5 40.103,68.5 42.103,68.5 44.103,68.5 46.103,68.5 48.103,68.5 50.103,68.5 52.103,68.5 54.103,68.5 56.103,68.5 58.103,68.5 60.103,68.5 62.103,68.5 64.103,68.5 66.103,68.5 68.103,68.5 70.103,68.5 72.103,68.5 74.103,68.5 76.103,68.5 78.103,68.5 80.103,68.5 82.103,68.5 84.103,68.5 86.103,68.5 88.103,68.5 90.103,68.5 92.103,68.5 94.103,68.5 96.103,68.5 98.103,68.5 100.103,68.5 102.103,68.5 104.103,68.5 106.103,68.5 108.103,68.5 110.103,68.5 112.103,68.5 114.103,68.5
B1: J3_U_relay_ladder10.1 J3_U_relay_ladder10.2 K8_U_relay_ladder10.3 K8_U_relay_ladder10.7 P3.2 R12_U_relay_ladder10.2 R20_U_relay_ladder10.2 TP1.1 | length 183.6
  Top Layer w0.3: v3(33.5,3.8) 34.492,3.8 ; R20_U_relay_ladder10.2@35,14.15 R20_U_relay_ladder10.2@35.25,13.9 ; R20_U_relay_ladder10.2@35,14.4 35.002,14.398 35.002,14.15 35.002,12.302 K8_U_relay_ladder10.7@35.003,12.3 35.003,11.65 33.8,10.447 33.8,4.492 34.492,3.8 ; v1(36,5) 36,3.9 J3_U_relay_ladder10.1@36.1,3.8 ; K8_U_relay_ladder10.3@37.2,5.899 37.2,4.55 37.7,4.05 R12_U_relay_ladder10.2@37.7,3.8 J3_U_relay_ladder10.1@36.1,3.8 ; 34.492,3.8 J3_U_relay_ladder10.2@34.786,3.8 ; J3_U_relay_ladder10.2@34.786,3.8 J3_U_relay_ladder10.2@35.111,3.8 ; J3_U_relay_ladder10.2@34.786,3.8 J3_U_relay_ladder10.2@35.111,3.8 ; J3_U_relay_ladder10.2@35.111,3.8 J3_U_relay_ladder10.1@35.686,3.8 ; J3_U_relay_ladder10.2@35.111,3.8 J3_U_relay_ladder10.1@35.686,3.8 ; J3_U_relay_ladder10.1@35.686,3.8 J3_U_relay_ladder10.1@36.1,3.8 ; J3_U_relay_ladder10.1@35.686,3.8 J3_U_relay_ladder10.1@36.1,3.8 ; J3_U_relay_ladder10.1@35.686,3.8 J3_U_relay_ladder10.1@36.1,3.8
  Mid Layer 1 w0.2: v3(33.5,3.8) 35.2,5.5 115.495,5.5 ; v1(36,5) 36.45,4.55 37.2,4.55 115.499,4.5
B2: J3_U_relay_ladder9.1 J3_U_relay_ladder9.2 K8_U_relay_ladder9.3 K8_U_relay_ladder9.7 P3.6 R12_U_relay_ladder9.2 R20_U_relay_ladder9.2 TP2.1 | length 183.6
  Top Layer w0.3: v3(33.5,17) 34.492,17 ; R20_U_relay_ladder9.2@35,27.35 R20_U_relay_ladder9.2@35.25,27.1 ; R20_U_relay_ladder9.2@35,27.6 35.002,27.598 35.002,27.35 35.002,25.502 K8_U_relay_ladder9.7@35.003,25.5 35.003,24.85 33.8,23.647 33.8,17.692 34.492,17 ; v1(36,18.2) 36,17.1 J3_U_relay_ladder9.1@36.1,17 ; K8_U_relay_ladder9.3@37.2,19.099 37.2,17.75 37.7,17.25 R12_U_relay_ladder9.2@37.7,17 J3_U_relay_ladder9.1@36.1,17 ; 34.492,17 J3_U_relay_ladder9.2@34.786,17 ; J3_U_relay_ladder9.2@34.786,17 J3_U_relay_ladder9.2@35.111,17 ; J3_U_relay_ladder9.2@34.786,17 J3_U_relay_ladder9.2@35.111,17 ; J3_U_relay_ladder9.2@35.111,17 J3_U_relay_ladder9.1@35.686,17 ; J3_U_relay_ladder9.2@35.111,17 J3_U_relay_ladder9.1@35.686,17 ; J3_U_relay_ladder9.1@35.686,17 J3_U_relay_ladder9.1@36.1,17 ; J3_U_relay_ladder9.1@35.686,17 J3_U_relay_ladder9.1@36.1,17 ; J3_U_relay_ladder9.1@35.686,17 J3_U_relay_ladder9.1@36.1,17
  Mid Layer 1 w0.2: v3(33.5,17) 35.2,18.7 115.495,18.7 ; v1(36,18.2) 36.45,17.75 37.2,17.75 115.499,17.7
B3: J3_U_relay_ladder8.1 J3_U_relay_ladder8.2 K8_U_relay_ladder8.3 K8_U_relay_ladder8.7 P3.10 R12_U_relay_ladder8.2 R20_U_relay_ladder8.2 TP3.1 | length 183.6
  Top Layer w0.3: v3(33.5,30.2) 34.492,30.2 ; R20_U_relay_ladder8.2@35,40.55 R20_U_relay_ladder8.2@35.25,40.3 ; R20_U_relay_ladder8.2@35,40.8 35.002,40.798 35.002,40.55 35.002,38.702 K8_U_relay_ladder8.7@35.003,38.7 35.003,38.05 33.8,36.847 33.8,30.892 34.492,30.2 ; v1(36,31.4) 36,30.3 J3_U_relay_ladder8.1@36.1,30.2 ; K8_U_relay_ladder8.3@37.2,32.299 37.2,30.95 37.7,30.45 R12_U_relay_ladder8.2@37.7,30.2 J3_U_relay_ladder8.1@36.1,30.2 ; 34.492,30.2 J3_U_relay_ladder8.2@34.786,30.2 ; J3_U_relay_ladder8.2@34.786,30.2 J3_U_relay_ladder8.2@35.111,30.2 ; J3_U_relay_ladder8.2@34.786,30.2 J3_U_relay_ladder8.2@35.111,30.2 ; J3_U_relay_ladder8.2@35.111,30.2 J3_U_relay_ladder8.1@35.686,30.2 ; J3_U_relay_ladder8.2@35.111,30.2 J3_U_relay_ladder8.1@35.686,30.2 ; J3_U_relay_ladder8.1@35.686,30.2 J3_U_relay_ladder8.1@36.1,30.2 ; J3_U_relay_ladder8.1@35.686,30.2 J3_U_relay_ladder8.1@36.1,30.2 ; J3_U_relay_ladder8.1@35.686,30.2 J3_U_relay_ladder8.1@36.1,30.2
  Mid Layer 1 w0.2: v3(33.5,30.2) 35.2,31.9 115.495,31.9 ; v1(36,31.4) 36.45,30.95 37.2,30.95 115.499,30.9
B4: J3_U_relay_ladder7.1 J3_U_relay_ladder7.2 K8_U_relay_ladder7.3 K8_U_relay_ladder7.7 P3.14 R12_U_relay_ladder7.2 R20_U_relay_ladder7.2 TP4.1 | length 183.6
  Top Layer w0.3: v3(33.5,43.4) 34.492,43.4 ; R20_U_relay_ladder7.2@35,53.75 R20_U_relay_ladder7.2@35.25,53.5 ; R20_U_relay_ladder7.2@35,54 35.002,53.998 35.002,53.75 35.002,51.902 K8_U_relay_ladder7.7@35.003,51.9 35.003,51.25 33.8,50.047 33.8,44.092 34.492,43.4 ; v1(36,44.6) 36,43.5 J3_U_relay_ladder7.1@36.1,43.4 ; K8_U_relay_ladder7.3@37.2,45.499 37.2,44.15 37.7,43.65 R12_U_relay_ladder7.2@37.7,43.4 J3_U_relay_ladder7.1@36.1,43.4 ; 34.492,43.4 J3_U_relay_ladder7.2@34.786,43.4 ; J3_U_relay_ladder7.2@34.786,43.4 J3_U_relay_ladder7.2@35.111,43.4 ; J3_U_relay_ladder7.2@34.786,43.4 J3_U_relay_ladder7.2@35.111,43.4 ; J3_U_relay_ladder7.2@35.111,43.4 J3_U_relay_ladder7.1@35.686,43.4 ; J3_U_relay_ladder7.2@35.111,43.4 J3_U_relay_ladder7.1@35.686,43.4 ; J3_U_relay_ladder7.1@35.686,43.4 J3_U_relay_ladder7.1@36.1,43.4 ; J3_U_relay_ladder7.1@35.686,43.4 J3_U_relay_ladder7.1@36.1,43.4 ; J3_U_relay_ladder7.1@35.686,43.4 J3_U_relay_ladder7.1@36.1,43.4
  Mid Layer 1 w0.2: v3(33.5,43.4) 35.2,45.1 115.495,45.1 ; v1(36,44.6) 36.45,44.15 37.2,44.15 115.499,44.1
B5: J3_U_relay_ladder6.1 J3_U_relay_ladder6.2 K8_U_relay_ladder6.3 K8_U_relay_ladder6.7 P3.18 R12_U_relay_ladder6.2 R20_U_relay_ladder6.2 TP5.1 | length 183.6
  Top Layer w0.3: v3(33.5,56.6) 34.492,56.6 ; R20_U_relay_ladder6.2@35,66.95 R20_U_relay_ladder6.2@35.25,66.7 ; R20_U_relay_ladder6.2@35,67.2 35.002,67.198 35.002,66.95 35.002,65.102 K8_U_relay_ladder6.7@35.003,65.1 35.003,64.45 33.8,63.247 33.8,57.292 34.492,56.6 ; v1(36,57.8) 36,56.7 J3_U_relay_ladder6.1@36.1,56.6 ; K8_U_relay_ladder6.3@37.2,58.699 37.2,57.35 37.7,56.85 R12_U_relay_ladder6.2@37.7,56.6 J3_U_relay_ladder6.1@36.1,56.6 ; 34.492,56.6 J3_U_relay_ladder6.2@34.786,56.6 ; J3_U_relay_ladder6.2@34.786,56.6 J3_U_relay_ladder6.2@35.111,56.6 ; J3_U_relay_ladder6.2@34.786,56.6 J3_U_relay_ladder6.2@35.111,56.6 ; J3_U_relay_ladder6.2@35.111,56.6 J3_U_relay_ladder6.1@35.686,56.6 ; J3_U_relay_ladder6.2@35.111,56.6 J3_U_relay_ladder6.1@35.686,56.6 ; J3_U_relay_ladder6.1@35.686,56.6 J3_U_relay_ladder6.1@36.1,56.6 ; J3_U_relay_ladder6.1@35.686,56.6 J3_U_relay_ladder6.1@36.1,56.6 ; J3_U_relay_ladder6.1@35.686,56.6 J3_U_relay_ladder6.1@36.1,56.6
  Mid Layer 1 w0.2: v3(33.5,56.6) 35.2,58.3 115.495,58.3 ; v1(36,57.8) 36.45,57.35 37.2,57.35 115.499,57.3
B6: J3_U_relay_ladder5.1 J3_U_relay_ladder5.2 K8_U_relay_ladder5.3 K8_U_relay_ladder5.7 P6.18 R12_U_relay_ladder5.2 R20_U_relay_ladder5.2 TP6.1 | length 181.8
  Mid Layer 2 w0.2: v3(33.503,67.2) 33.503,66.7 34.703,65.5 115.578,65.5 ; v1(36.087,66.037) 36.549,66.5 115.503,66.5
  Bottom Layer w0.2: v1(36.087,66.037) 36.103,66.054 J3_U_relay_ladder5.2@36.103,67.2
  Bottom Layer w0.3: v3(33.503,67.2) 34.495,67.2 ; R20_U_relay_ladder5.2@35.003,56.6 35.005,56.601 K8_U_relay_ladder5.7@35.003,58.7 35.006,58.699 35.006,59.349 33.803,60.552 33.803,66.508 34.495,67.2 ; J3_U_relay_ladder5.2@35.903,67.154 J3_U_relay_ladder5.2@35.857,67.2 ; K8_U_relay_ladder5.3@37.203,65.1 37.203,66.45 37.703,66.95 37.703,67.2 36.103,67.2 J3_U_relay_ladder5.2@35.857,67.2 ; 34.495,67.2 35.511,67.2 J3_U_relay_ladder5.2@35.857,67.2
B7: J3_U_relay_ladder4.1 J3_U_relay_ladder4.2 K8_U_relay_ladder4.3 K8_U_relay_ladder4.7 P6.14 R12_U_relay_ladder4.2 R20_U_relay_ladder4.2 TP7.1 | length 181.8
  Mid Layer 2 w0.2: v3(33.503,54) 33.503,53.5 34.703,52.3 115.578,52.3 ; v1(36.087,52.837) 36.549,53.3 115.503,53.3
  Bottom Layer w0.2: v1(36.087,52.837) 36.103,52.854 J3_U_relay_ladder4.2@36.103,54
  Bottom Layer w0.3: v3(33.503,54) 34.495,54 ; R20_U_relay_ladder4.2@35.003,43.4 35.005,43.401 K8_U_relay_ladder4.7@35.003,45.5 35.006,45.499 35.006,46.149 33.803,47.352 33.803,53.308 34.495,54 ; J3_U_relay_ladder4.2@35.903,53.954 J3_U_relay_ladder4.2@35.857,54 ; K8_U_relay_ladder4.3@37.203,51.9 37.203,53.25 37.703,53.75 37.703,54 36.103,54 J3_U_relay_ladder4.2@35.857,54 ; 34.495,54 35.511,54 J3_U_relay_ladder4.2@35.857,54
B8: J3_U_relay_ladder3.1 J3_U_relay_ladder3.2 K8_U_relay_ladder3.3 K8_U_relay_ladder3.7 P6.10 R12_U_relay_ladder3.2 R20_U_relay_ladder3.2 TP8.1 | length 181.8
  Mid Layer 2 w0.2: v3(33.503,40.8) 33.503,40.3 34.703,39.1 115.578,39.1 ; v1(36.087,39.637) 36.549,40.1 115.503,40.1
  Bottom Layer w0.2: v1(36.087,39.637) 36.103,39.654 J3_U_relay_ladder3.2@36.103,40.8
  Bottom Layer w0.3: v3(33.503,40.8) 34.495,40.8 ; R20_U_relay_ladder3.2@35.003,30.2 35.005,30.201 35.005,32.298 35.006,32.299 35.006,32.949 33.803,34.152 33.803,40.108 34.495,40.8 ; J3_U_relay_ladder3.2@35.903,40.754 J3_U_relay_ladder3.2@35.857,40.8 ; K8_U_relay_ladder3.3@37.203,38.7 37.203,40.05 37.703,40.55 37.703,40.8 36.103,40.8 J3_U_relay_ladder3.2@35.857,40.8 ; 34.495,40.8 35.511,40.8 J3_U_relay_ladder3.2@35.857,40.8
B9: J3_U_relay_ladder2.1 J3_U_relay_ladder2.2 K8_U_relay_ladder2.3 K8_U_relay_ladder2.7 P6.6 R12_U_relay_ladder2.2 R20_U_relay_ladder2.2 TP9.1 | length 181.8
  Mid Layer 2 w0.2: v3(33.503,27.6) 33.503,27.1 34.703,25.9 115.578,25.9 ; v1(36.087,26.437) 36.549,26.9 115.503,26.9
  Bottom Layer w0.2: v1(36.087,26.437) 36.103,26.454 J3_U_relay_ladder2.2@36.103,27.6
  Bottom Layer w0.3: v3(33.503,27.6) 34.495,27.6 ; R20_U_relay_ladder2.2@35.003,17 35.005,17.001 35.005,19.098 35.006,19.099 35.006,19.749 33.803,20.952 33.803,26.908 34.495,27.6 ; J3_U_relay_ladder2.2@35.903,27.554 J3_U_relay_ladder2.2@35.857,27.6 ; K8_U_relay_ladder2.3@37.203,25.5 37.203,26.85 37.703,27.35 37.703,27.6 36.103,27.6 J3_U_relay_ladder2.2@35.857,27.6 ; 34.495,27.6 35.511,27.6 J3_U_relay_ladder2.2@35.857,27.6
B10: J3_U_relay_ladder1.1 J3_U_relay_ladder1.2 K8_U_relay_ladder1.3 K8_U_relay_ladder1.7 P6.2 R12_U_relay_ladder1.2 R20_U_relay_ladder1.2 TP10.1 | length 181.8
  Mid Layer 2 w0.2: v3(33.503,14.4) 33.503,13.9 34.703,12.7 115.578,12.7 ; v1(36.087,13.237) 36.549,13.7 115.503,13.7
  Bottom Layer w0.2: v1(36.087,13.237) 36.103,13.254 J3_U_relay_ladder1.2@36.103,14.4
  Bottom Layer w0.3: v3(33.503,14.4) 34.495,14.4 ; R20_U_relay_ladder1.2@35.003,3.8 35.005,3.801 35.005,5.898 35.006,5.899 35.006,6.549 33.803,7.752 33.803,13.708 34.495,14.4 ; J3_U_relay_ladder1.2@35.903,14.354 J3_U_relay_ladder1.2@35.857,14.4 ; K8_U_relay_ladder1.3@37.203,12.3 37.203,13.65 37.703,14.15 37.703,14.4 36.103,14.4 J3_U_relay_ladder1.2@35.857,14.4 ; 34.495,14.4 35.511,14.4 J3_U_relay_ladder1.2@35.857,14.4
B_P: B2.9 J2.1 P1.7 P2.7
BTN: B1.7 X1.2
C1: K1_U_relay_ladder10.4 P3.1 R5_U_relay_ladder10.1 | length 2.1
  Top Layer w0.3: K1_U_relay_ladder10.4@114.297,5.9 114.299,5.898 114.299,3.801 R5_U_relay_ladder10.1@114.3,3.8
C2: K1_U_relay_ladder9.4 P3.5 R5_U_relay_ladder9.1 | length 2.1
  Top Layer w0.3: K1_U_relay_ladder9.4@114.297,19.1 114.299,19.098 114.299,17.001 R5_U_relay_ladder9.1@114.3,17
C3: K1_U_relay_ladder8.4 P3.9 R5_U_relay_ladder8.1 | length 2.1
  Top Layer w0.3: K1_U_relay_ladder8.4@114.297,32.3 114.299,32.298 114.299,30.201 R5_U_relay_ladder8.1@114.3,30.2
C4: K1_U_relay_ladder7.4 P3.13 R5_U_relay_ladder7.1 | length 2.1
  Top Layer w0.3: K1_U_relay_ladder7.4@114.297,45.5 K1_U_relay_ladder7.4@114.297,45.5 114.299,43.401 R5_U_relay_ladder7.1@114.3,43.4
C5: K1_U_relay_ladder6.4 P3.17 R5_U_relay_ladder6.1 | length 2.1
  Top Layer w0.3: K1_U_relay_ladder6.4@114.297,58.7 K1_U_relay_ladder6.4@114.297,58.7 114.299,56.601 R5_U_relay_ladder6.1@114.3,56.6
C6: K1_U_relay_ladder5.4 P6.19 R5_U_relay_ladder5.1 | length 2.1
  Bottom Layer w0.3: K1_U_relay_ladder5.4@114.297,65.1 114.299,65.102 114.299,67.198 R5_U_relay_ladder5.1@114.3,67.2
C7: K1_U_relay_ladder4.4 P6.15 R5_U_relay_ladder4.1 | length 2.1
  Bottom Layer w0.3: K1_U_relay_ladder4.4@114.297,51.9 114.299,51.902 114.299,53.998 R5_U_relay_ladder4.1@114.3,54
C8: K1_U_relay_ladder3.4 P6.11 R5_U_relay_ladder3.1 | length 2.1
  Bottom Layer w0.3: K1_U_relay_ladder3.4@114.297,38.7 K1_U_relay_ladder3.4@114.297,38.7 114.299,40.798 R5_U_relay_ladder3.1@114.3,40.8
C9: K1_U_relay_ladder2.4 P6.7 R5_U_relay_ladder2.1 | length 2.1
  Bottom Layer w0.3: K1_U_relay_ladder2.4@114.297,25.5 K1_U_relay_ladder2.4@114.297,25.5 114.299,27.598 R5_U_relay_ladder2.1@114.3,27.6
C10: K1_U_relay_ladder1.4 P6.3 R5_U_relay_ladder1.1 | length 2.1
  Bottom Layer w0.3: K1_U_relay_ladder1.4@114.297,12.3 K1_U_relay_ladder1.4@114.297,12.3 114.299,14.398 R5_U_relay_ladder1.1@114.3,14.4
GND: B1.4 B2.6 B2.11 C1.2 C2.2 C3.2 C4.1 C5.1 C6.1 C7.1 C8.2 C9.2 C10.2 C11.2 C12.1 C13.1 C20.2 C21.2 C22.1 C23.1 C24.1 C25.1 LD1.2 MCP1.6 MCP1.11 MCP1.12 MCP1.13 MCP2.6 MCP2.12 MCP2.13 MCP3.6 MCP3.11 MCP3.13 MCP4.6 MCP4.13 MCP5.6 MCP5.11 MCP5.12 P1.5 P1.8 P2.5 P2.8 P4.1 P4.5 P5.1 P5.5 X1.1 | length 15.1
  Top Layer w0.2: MCP1.13@15.85,9.3 MCP1.12@15.85,9.95 MCP1.11@15.85,10.6 ; v1(16.3,14.5) C13.1@17.02,14.5 17.02,14.464 17.256,14.228 17.256,13.344 MCP1.6@17.275,13.325 ; v1(16.3,27.7) C12.1@17.02,27.7 17.02,27.664 17.256,27.428 17.256,26.494 MCP5.6@17.275,26.475 ; v1(16.3,41) C25.1@17.02,41 17.02,40.964 17.256,40.728 17.256,39.744 MCP2.6@17.275,39.725 ; v1(16.3,54.1) C7.1@17.02,54.1 17.02,54.064 17.256,53.828 17.256,52.894 MCP4.6@17.275,52.875 ; v1(16.4,67.3) C24.1@17.06,67.3 17.06,67.264 17.256,67.068 17.256,66.094 MCP3.6@17.275,66.075 ; C4.1@16.44,6.7 v1(17.2,6.7) ; C23.1@16.44,19.9 v1(17.1,19.9) ; C5.1@16.44,33.1 v1(17.2,33.1) ; C22.1@16.44,46.2 v1(17.1,46.2) ; C6.1@16.44,59.4 v1(17.2,59.4)
INT: B1.6 P1.10 P2.10
MISO: J1.1 P1.1 P2.1
MISO_MCU: B1.24 J1.2 P2.2
MOSI_MCU: B1.25 P1.2
NetC4_2: C4.2 MCP1.14 R21.2 | length 3
  Top Layer w0.2: R21.2@15.56,5.9 15.58,5.92 15.58,8.604 15.626,8.65 MCP1.14@15.85,8.65
NetC5_2: C5.2 MCP2.14 R22.2 | length 3
  Top Layer w0.2: R22.2@15.56,32.3 C5.2@15.56,33.1 15.58,33.12 15.58,35.004 15.626,35.05 MCP2.14@15.85,35.05
NetC6_2: C6.2 MCP3.14 R23.2 | length 3.1
  Top Layer w0.2: R23.2@15.56,58.6 15.58,58.62 15.58,61.354 15.626,61.4 MCP3.14@15.85,61.4
NetC22_2: C22.2 MCP4.14 R24.2 | length 3.1
  Top Layer w0.2: R24.2@15.56,45.4 C22.2@15.56,46.2 15.58,46.22 15.58,48.154 15.626,48.2 MCP4.14@15.85,48.2
NetC23_2: C23.2 MCP5.14 R25.2 | length 3
  Top Layer w0.2: R25.2@15.56,19.1 15.58,19.12 15.58,21.754 15.626,21.8 MCP5.14@15.85,21.8
NetJ2_2: J2.2 R3.1
NetK1_U_relay_ladder1_3: K1_U_relay_ladder1.3 K2_U_relay_ladder1.4 R5_U_relay_ladder1.2 R6_U_relay_ladder1.1 | length 13.4
  Bottom Layer w0.3: K2_U_relay_ladder1.4@103.597,12.3 103.599,12.301 103.599,14.398 103.6,14.4 112.6,14.4 112.6,14.15 112.1,13.65 K1_U_relay_ladder1.3@112.1,12.3
NetK1_U_relay_ladder1_7: K1_U_relay_ladder1.7 K2_U_relay_ladder1.6 R13_U_relay_ladder1.2 R14_U_relay_ladder1.1 | length 13.4
  Bottom Layer w0.3: K2_U_relay_ladder1.6@101.4,5.9 101.4,4.55 100.9,4.05 R14_U_relay_ladder1.1@100.9,3.8 109.9,3.8 109.902,3.801 109.902,5.898 K1_U_relay_ladder1.7@109.903,5.9
NetK1_U_relay_ladder1_8: K1_U_relay_ladder1.8 ULN10.17 | length 86.7
  Top Layer w0.2: ULN10.17@26.975,14.225 26.985,14.235 26.985,14.985 v1(27,15)
  Mid Layer 2 w0.2: v1(27,15) 29.18,15 31.306,12.873 31.306,11.2 31.597,10.91 103.694,10.91 106,8.604 v1(106,6.7)
  Bottom Layer w0.2: v1(106,6.7) 106.453,6.7 106.703,6.45 K1_U_relay_ladder1.8@106.703,5.9
NetK1_U_relay_ladder2_3: K1_U_relay_ladder2.3 K2_U_relay_ladder2.4 R5_U_relay_ladder2.2 R6_U_relay_ladder2.1 | length 13.4
  Bottom Layer w0.3: K2_U_relay_ladder2.4@103.597,25.5 103.599,25.501 R6_U_relay_ladder2.1@103.6,27.6 R6_U_relay_ladder2.1@103.6,27.6 112.6,27.6 112.6,27.35 112.1,26.85 K1_U_relay_ladder2.3@112.1,25.5
NetK1_U_relay_ladder2_7: K1_U_relay_ladder2.7 K2_U_relay_ladder2.6 R13_U_relay_ladder2.2 R14_U_relay_ladder2.1 | length 13.4
  Bottom Layer w0.3: K2_U_relay_ladder2.6@101.4,19.1 101.4,17.75 100.9,17.25 R14_U_relay_ladder2.1@100.9,17 109.9,17 109.902,17.001 109.902,19.098 K1_U_relay_ladder2.7@109.903,19.1
NetK1_U_relay_ladder2_8: K1_U_relay_ladder2.8 ULN9.17 | length 86.7
  Top Layer w0.2: ULN9.17@26.975,27.425 26.985,27.435 26.985,28.185 v1(27,28.2)
  Mid Layer 2 w0.2: v1(27,28.2) 29.18,28.2 31.306,26.073 31.306,24.4 31.597,24.11 103.694,24.11 106,21.804 v1(106,19.9)
  Bottom Layer w0.2: v1(106,19.9) 106.453,19.9 106.703,19.65 K1_U_relay_ladder2.8@106.703,19.1
NetK1_U_relay_ladder3_3: K1_U_relay_ladder3.3 K2_U_relay_ladder3.4 R5_U_relay_ladder3.2 R6_U_relay_ladder3.1 | length 13.4
  Bottom Layer w0.3: K2_U_relay_ladder3.4@103.598,38.7 103.599,38.701 R6_U_relay_ladder3.1@103.6,40.8 R6_U_relay_ladder3.1@103.6,40.8 112.6,40.8 112.6,40.55 112.1,40.05 K1_U_relay_ladder3.3@112.1,38.7
NetK1_U_relay_ladder3_7: K1_U_relay_ladder3.7 K2_U_relay_ladder3.6 R13_U_relay_ladder3.2 R14_U_relay_ladder3.1 | length 13.4
  Bottom Layer w0.3: K2_U_relay_ladder3.6@101.4,32.3 101.4,30.95 100.9,30.45 R14_U_relay_ladder3.1@100.9,30.2 109.9,30.2 109.902,30.201 109.902,32.298 K1_U_relay_ladder3.7@109.903,32.3
NetK1_U_relay_ladder3_8: K1_U_relay_ladder3.8 ULN8.17 | length 86.7
  Top Layer w0.2: ULN8.17@26.975,40.625 26.985,40.635 26.985,41.385 v1(27,41.4)
  Mid Layer 2 w0.2: v1(27,41.4) 29.18,41.4 31.306,39.273 31.306,37.6 31.597,37.31 103.694,37.31 106,35.004 v1(106,33.1)
  Bottom Layer w0.2: v1(106,33.1) 106.453,33.1 106.703,32.85 K1_U_relay_ladder3.8@106.703,32.3
NetK1_U_relay_ladder4_3: K1_U_relay_ladder4.3 K2_U_relay_ladder4.4 R5_U_relay_ladder4.2 R6_U_relay_ladder4.1 | length 13.4
  Bottom Layer w0.3: K2_U_relay_ladder4.4@103.597,51.9 103.599,51.901 103.599,53.998 R6_U_relay_ladder4.1@103.6,54 112.6,54 112.6,53.75 112.1,53.25 K1_U_relay_ladder4.3@112.1,51.9
NetK1_U_relay_ladder4_7: K1_U_relay_ladder4.7 K2_U_relay_ladder4.6 R13_U_relay_ladder4.2 R14_U_relay_ladder4.1 | length 13.4
  Bottom Layer w0.3: K2_U_relay_ladder4.6@101.4,45.5 101.4,44.15 100.9,43.65 R14_U_relay_ladder4.1@100.9,43.4 109.9,43.4 109.902,43.401 109.902,45.498 K1_U_relay_ladder4.7@109.903,45.5
NetK1_U_relay_ladder4_8: K1_U_relay_ladder4.8 ULN7.17 | length 86.7
  Top Layer w0.2: ULN7.17@26.975,53.825 26.985,53.835 26.985,54.585 v1(27,54.6)
  Mid Layer 2 w0.2: v1(27,54.6) 29.18,54.6 31.306,52.473 31.306,50.8 31.597,50.51 103.694,50.51 106,48.204 v1(106,46.3)
  Bottom Layer w0.2: v1(106,46.3) 106.453,46.3 106.703,46.05 K1_U_relay_ladder4.8@106.703,45.5
NetK1_U_relay_ladder5_3: K1_U_relay_ladder5.3 K2_U_relay_ladder5.4 R5_U_relay_ladder5.2 R6_U_relay_ladder5.1 | length 13.4
  Bottom Layer w0.3: K2_U_relay_ladder5.4@103.597,65.1 103.599,65.101 103.599,67.198 R6_U_relay_ladder5.1@103.6,67.2 112.6,67.2 112.6,66.95 112.1,66.45 K1_U_relay_ladder5.3@112.1,65.1
NetK1_U_relay_ladder5_7: K1_U_relay_ladder5.7 K2_U_relay_ladder5.6 R13_U_relay_ladder5.2 R14_U_relay_ladder5.1 | length 13.4
  Bottom Layer w0.3: K2_U_relay_ladder5.6@101.4,58.7 101.4,57.35 100.9,56.85 R14_U_relay_ladder5.1@100.9,56.6 109.9,56.6 109.902,56.601 109.902,58.698 K1_U_relay_ladder5.7@109.903,58.7